# Altium PCB Panel-DQLA-Q.PcbDoc
Units mil, origin at the board's own origin, x right, y up, seen from the top; angles counter-clockwise.
Board outline 14000 x 7000 mil, 6 copper layers (Top Layer, Plane 1, Signal 1, Signal 2, Plane 2, Bottom Layer), stack 32.112 mil thick; 16 components, 0 nets, 144 pads, 0 vias.
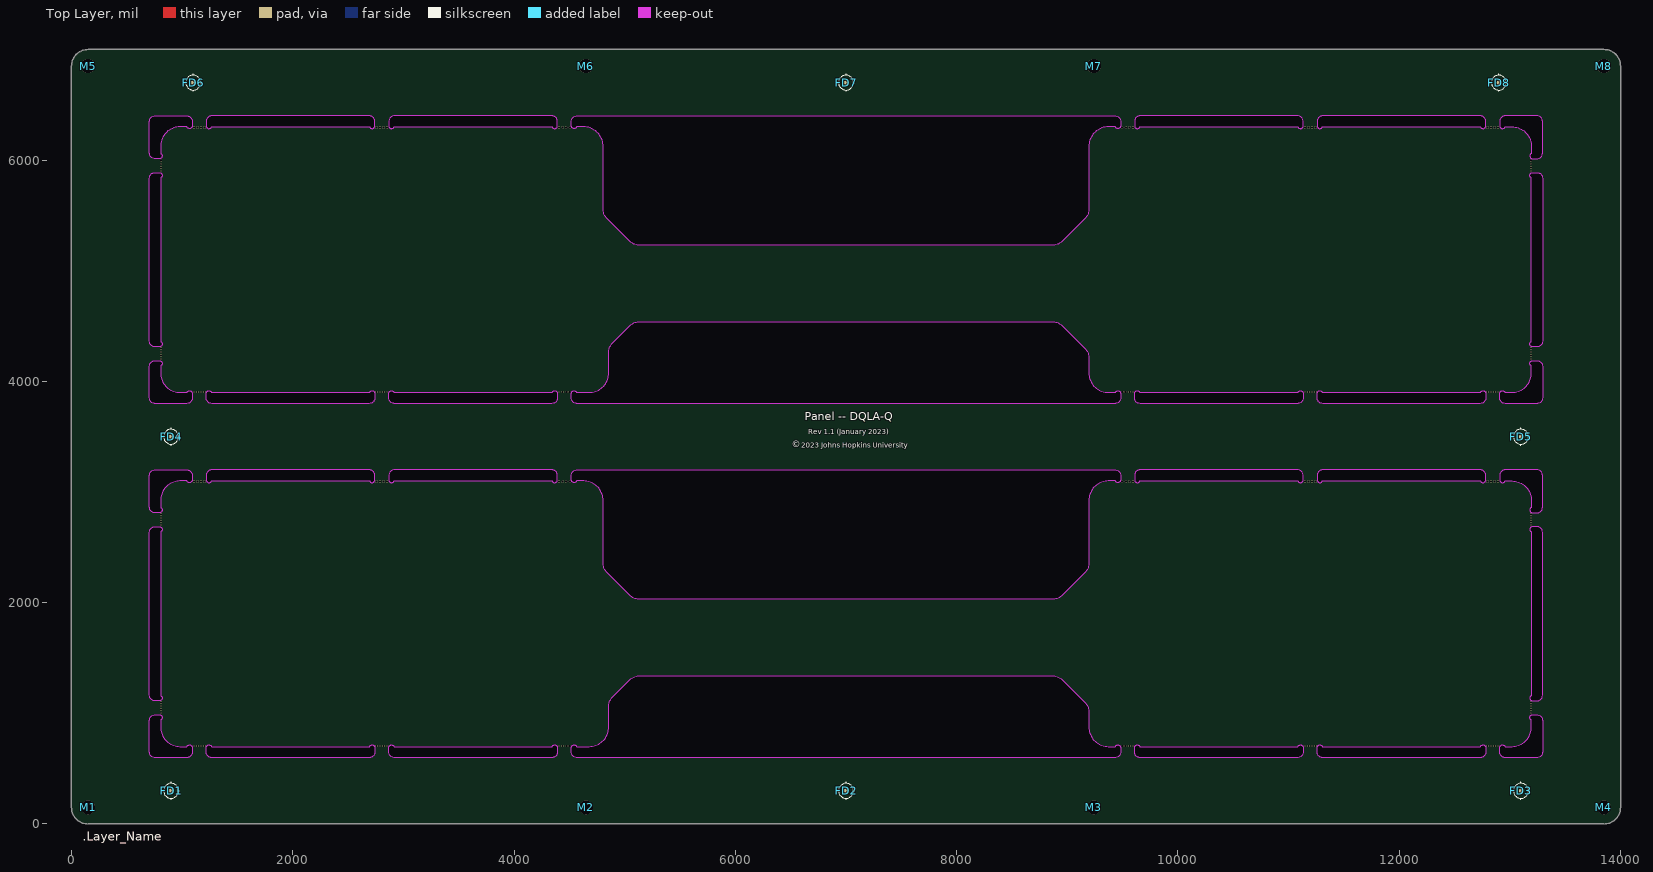
[diagram p0: Top Layer view]
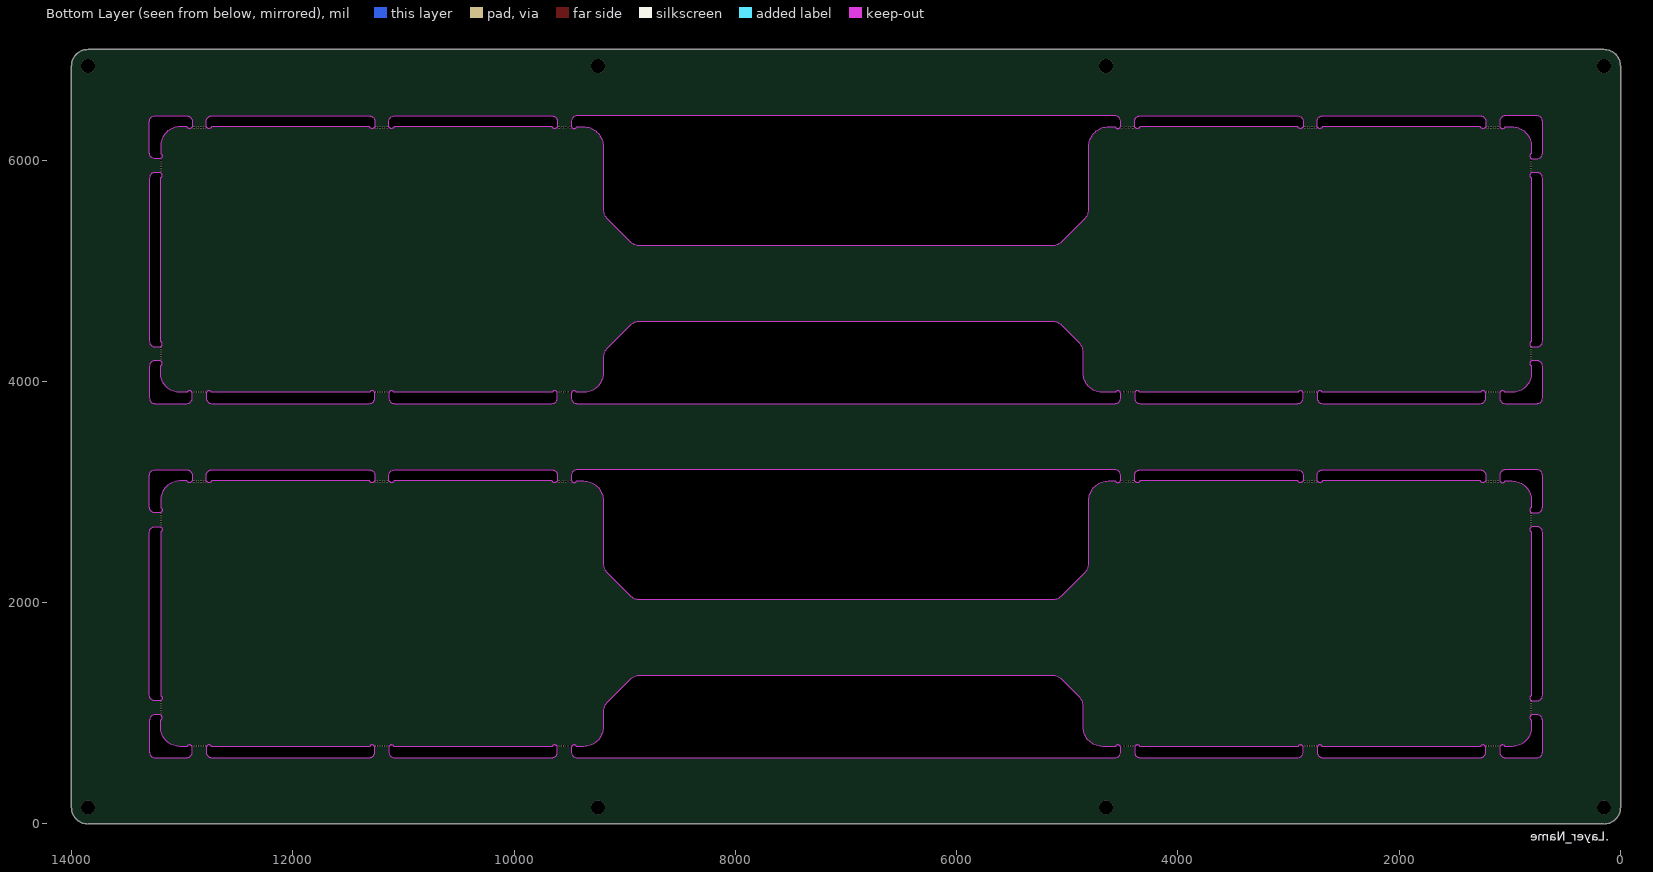
[diagram p1: Bottom Layer view, seen from below]
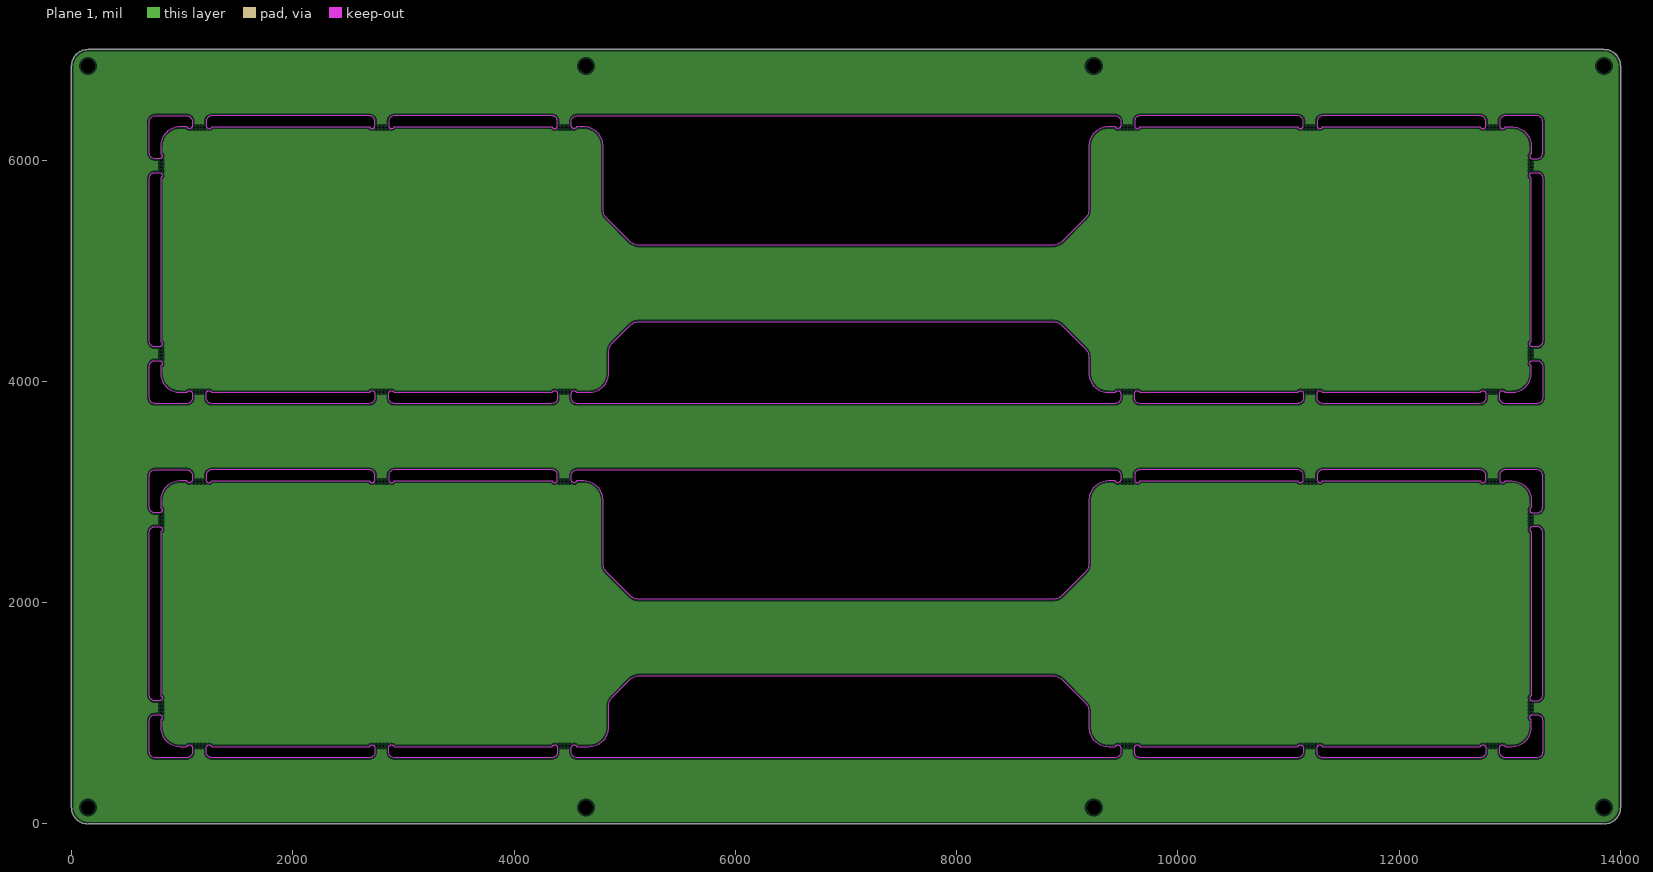
[diagram p2: Plane 1, clearances drawn from the general rule]
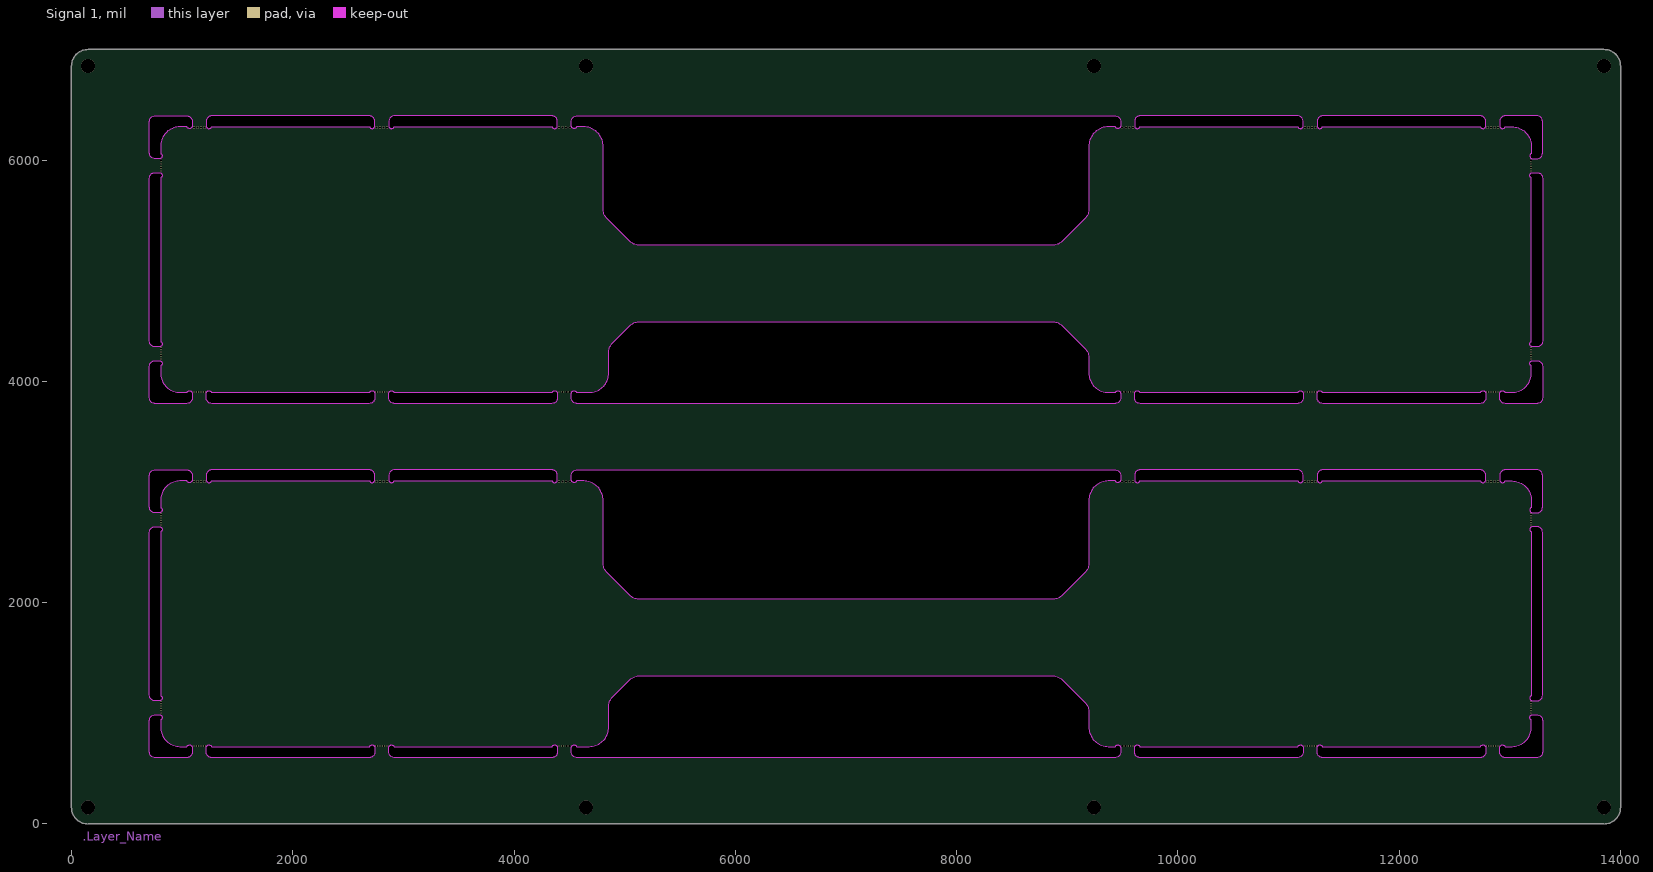
[diagram p3: Signal 1]
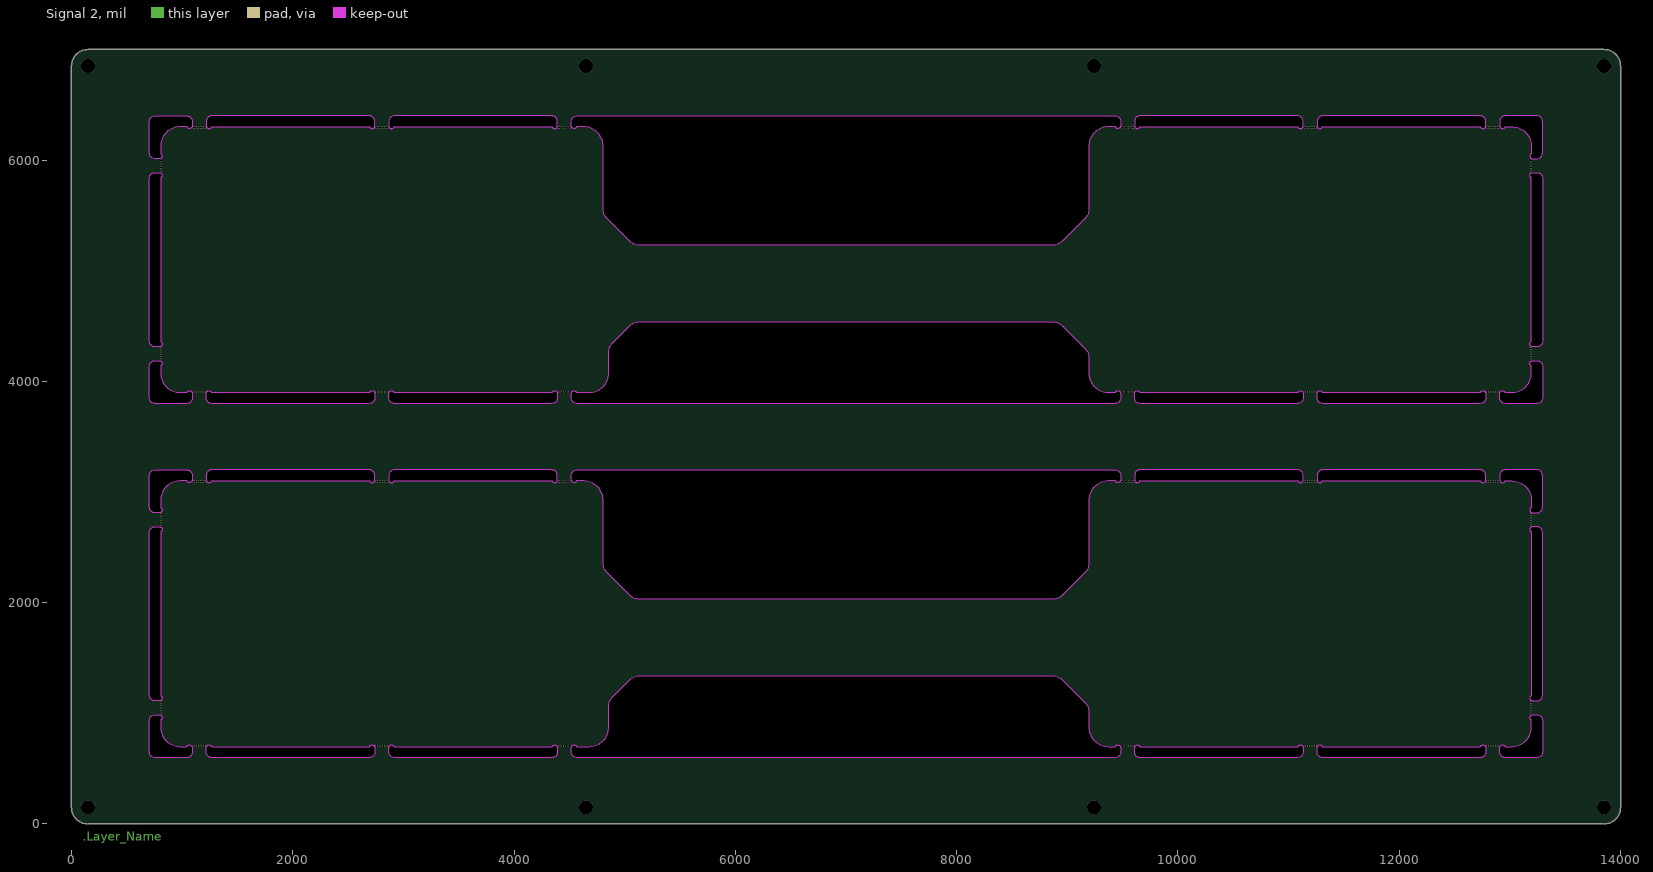
[diagram p4: Signal 2]
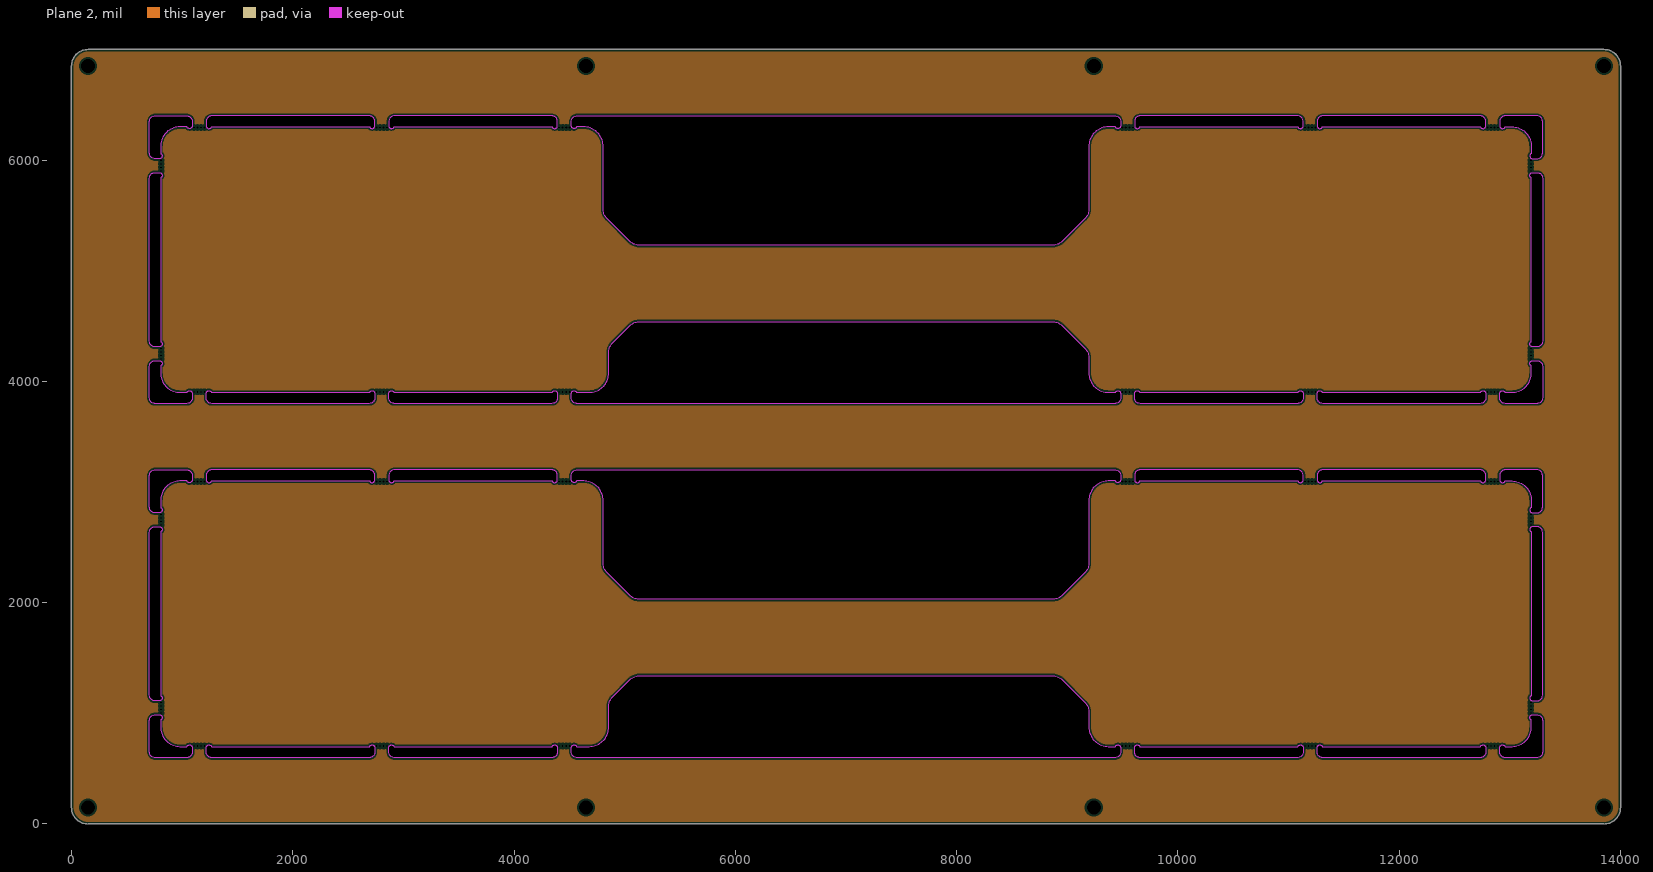
[diagram p5: Plane 2, clearances drawn from the general rule]

## Layer stack, top to bottom
Top Solder: solder mask 0.4, Solder Resist, Dk 3.5
Top Layer: signal copper 1.4
Dielectric 2: prepreg 2.8, PP-006, Dk 4.1
Plane 1: plane copper 1.378
Dielectric 4: core 2.8, PP-006, Dk 4.1
Signal 1: signal copper 1.378
Dielectric 1: dielectric 12.6, FR-4, Dk 4.8
Signal 2: signal copper 1.378
Dielectric 5: core 2.8, PP-006, Dk 4.1
Plane 2: plane copper 1.378
Dielectric 3: prepreg 2.8, PP-006, Dk 4.1
Bottom Layer: signal copper 1.4
Bottom Solder: solder mask 0.4, Solder Resist, Dk 3.5

## Board outline
0,150 0,6850 cw(c150,6850) 150,7000 13850,7000 cw(c13850,6850) 14000,6850 14000,150 cw(c13850,150) 13850,0 150,0 cw(c150,150)
cut-out: 4805,2360 4805,2925 ccw(c4630,2925) 4630,3100 4565.91,3100 cw(c4543,3110) 4518,3110 4518,3150 cw(c4568,3150) 4568,3200 9432,3200 cw(c9432,3150) 9482,3150 9482,3110 cw(c9457,3110) 9434.09,3100 9370,3100 ccw(c9370,2925) 9195,2925 9195,2360 cw(c9070,2360) 9158.39,2271.61 8953.39,2066.61 cw(c8865,2155) 8865,2030 5135,2030 cw(c5135,2155) 5046.61,2066.61 4841.61,2271.61 cw(c4930,2360)
cut-out: 4805,5560 4805,6125 ccw(c4630,6125) 4630,6300 4565.91,6300 cw(c4543,6310) 4518,6310 4518,6350 cw(c4568,6350) 4568,6400 9432,6400 cw(c9432,6350) 9482,6350 9482,6310 cw(c9457,6310) 9434.09,6300 9370,6300 ccw(c9370,6125) 9195,6125 9195,5560 cw(c9070,5560) 9158.39,5471.61 8953.39,5266.61 cw(c8865,5355) 8865,5230 5135,5230 cw(c5135,5355) 5046.61,5266.61 4841.61,5471.61 cw(c4930,5560)
cut-out: 9608,6310 ccw(c9633,6310) 9655.91,6300 9655.9,6300.01 11084.08,6300 ccw(c11106.99,6310) 11132,6310 11132,6350 ccw(c11082,6350) 11082,6400 9658,6400 ccw(c9658,6350) 9608,6350
cut-out: 11258,6310 ccw(c11283,6310) 11305.91,6300 12734.08,6299.99 ccw(c12757,6310) 12782,6310 12782,6350 ccw(c12732,6350) 12732,6400 11308,6400 ccw(c11308,6350) 11258,6350
cut-out: 9608,3110 ccw(c9633,3110) 9655.91,3100 9655.9,3100.01 11084.08,3100 ccw(c11107,3110) 11132,3110 11132,3150 ccw(c11082,3150) 11082,3200 9658,3200 ccw(c9658,3150) 9608,3150
cut-out: 11258,3110 ccw(c11283,3110) 11305.91,3100 12734.08,3099.99 ccw(c12757,3110) 12782,3110 12782,3150 ccw(c12732,3150) 12732,3200 11308,3200 ccw(c11308,3150) 11258,3150
cut-out: 2868,3110 ccw(c2893,3110) 2915.91,3100 4344.08,3099.99 ccw(c4367,3110) 4392,3110 4392,3150 ccw(c4342,3150) 4342,3200 2918,3200 ccw(c2918,3150) 2868,3150
cut-out: 1218,3110 ccw(c1243,3110) 1265.91,3100 1265.9,3100.01 2694.08,3100 ccw(c2717,3110) 2742,3110 2742,3150 ccw(c2692,3150) 2692,3200 1268,3200 ccw(c1268,3150) 1218,3150
cut-out: 2868,6310 ccw(c2893,6310) 2915.91,6300 4344.08,6299.99 ccw(c4367,6310) 4392,6310 4392,6350 ccw(c4342,6350) 4342,6400 2918,6400 ccw(c2918,6350) 2868,6350
cut-out: 1218,6310 ccw(c1243,6310) 1265.91,6300 1265.9,6300.01 2694.08,6300 ccw(c2716.99,6310) 2742,6310 2742,6350 ccw(c2692,6350) 2692,6400 1268,6400 ccw(c1268,6350) 1218,6350
cut-out: 755,6013 cw(c755,6063) 705,6063 705,6350 cw(c755,6350) 755,6400 1042,6400 cw(c1042,6350) 1092,6350 1092,6310 cw(c1067,6310) 1044.09,6300 980,6300 ccw(c980,6125) 805,6125 805,6060.91 cw(c795,6038) 795,6013
cut-out: 755,4313 cw(c755,4363) 705,4363 705,5837 cw(c755,5837) 755,5887 795,5887 cw(c795,5862) 805,5839.09 805,4360.91 cw(c795,4338) 795,4313
cut-out: 755,2813 cw(c755,2863) 705,2863 705,3150 cw(c755,3150) 755,3200 1042,3200 cw(c1042,3150) 1092,3150 1092,3110 cw(c1067,3110) 1044.09,3100 980,3100 ccw(c980,2925) 805,2925 805,2860.91 cw(c795,2838) 795,2813
cut-out: 755,1113 cw(c755,1163) 705,1163 705,2637 cw(c755,2637) 755,2687 795,2687 cw(c795,2662) 805,2639.09 805,1160.91 cw(c795,1138) 795,1113
cut-out: 12908,6310 ccw(c12933,6310) 12955.91,6300 13019.99,6300 cw(c13020,6125) 13195,6125 13195,6060.91 ccw(c13205,6038) 13205,6013 13245,6013 ccw(c13245,6063) 13295,6063 13295,6350 ccw(c13245,6350) 13245,6400 12958,6400 ccw(c12958,6350) 12908,6350
cut-out: 13195,4360.91 13195,5839.09 cw(c13205,5862) 13205,5887 13245,5887 cw(c13245,5837) 13295,5837 13295,4363 cw(c13245,4363) 13245,4313 13205,4313 cw(c13205,4338)
cut-out: 12908,3110 ccw(c12933,3110) 12955.91,3100 13019.99,3100 cw(c13020,2925) 13195,2925 13195,2860.91 ccw(c13205,2838) 13205,2813 13245,2813 ccw(c13245,2863) 13295,2863 13295,3150 ccw(c13245,3150) 13245,3200 12958,3200 ccw(c12958,3150) 12908,3150
cut-out: 13195,1160.91 ccw(c13205,1138) 13205,1113 13245,1113 ccw(c13245,1163) 13295,1163 13295,2637 ccw(c13245,2637) 13245,2687 13205,2687 ccw(c13205,2662) 13195,2639.09
cut-out: 12908,650 12908,690 cw(c12933,690) 12955.91,700 13020,700 ccw(c13020,875) 13195,875 13195,939.09 cw(c13205,962) 13205,987 13245,987 cw(c13245,937) 13295,937 13295,650 cw(c13245,650) 13245,600 12958,600 cw(c12958,650)
cut-out: 12908,3850 12908,3890 cw(c12933,3890) 12955.91,3900 13020,3900 ccw(c13020,4075) 13195,4075 13195,4139.09 cw(c13205,4162) 13205,4187 13245,4187 cw(c13245,4137) 13295,4137 13295,3850 cw(c13245,3850) 13245,3800 12958,3800 cw(c12958,3850)
cut-out: 11258,3850 11258,3890 cw(c11283,3890) 11305.91,3900 12734.08,3900.01 cw(c12757,3890) 12782,3890 12782,3850 cw(c12732,3850) 12732,3800 11308,3800 cw(c11308,3850)
cut-out: 9608,3850 9608,3890 cw(c9633,3890) 9655.91,3900 9655.9,3899.99 11084.08,3900 cw(c11106.99,3890) 11132,3890 11132,3850 cw(c11082,3850) 11082,3800 9658,3800 cw(c9658,3850)
cut-out: 11258,650 11258,690 cw(c11283,690) 11305.91,700 12734.08,700.01 cw(c12757,690) 12782,690 12782,650 cw(c12732,650) 12732,600 11308,600 cw(c11308,650)
cut-out: 9608,650 9608,690 cw(c9633,690) 9655.91,700 9655.9,699.99 11084.08,700 cw(c11107,690) 11132,690 11132,650 cw(c11082,650) 11082,600 9658,600 cw(c9658,650)
cut-out: 4518,3850 4518,3890 cw(c4543,3890) 4565.91,3900 4680,3900 ccw(c4680,4075) 4855,4075 4855,4260 cw(c4980,4260) 4891.61,4348.39 5046.61,4503.39 cw(c5135,4415) 5135,4540 8865,4540 cw(c8865,4415) 8953.39,4503.39 9158.39,4298.39 cw(c9070,4210) 9195,4210 9195,4075 ccw(c9370,4075) 9370,3900 9434.09,3900 cw(c9457,3890) 9482,3890 9482,3850 cw(c9432,3850) 9432,3800 4568,3800 cw(c4568,3850)
cut-out: 4518,650 4518,690 cw(c4543,690) 4565.91,700 4680,700 ccw(c4680,875) 4855,875 4855,1060 cw(c4980,1060) 4891.61,1148.39 5046.61,1303.39 cw(c5135,1215) 5135,1340 8865,1340 cw(c8865,1215) 8953.39,1303.39 9158.39,1098.39 cw(c9070,1010) 9195,1010 9195,875 ccw(c9370,875) 9370,700 9434.09,700 cw(c9457,690) 9482,690 9482,650 cw(c9432,650) 9432,600 4568,600 cw(c4568,650)
cut-out: 2868,3850 2868,3890 cw(c2893,3890) 2915.91,3900 4344.08,3900.01 cw(c4367,3890) 4392,3890 4392,3850 cw(c4342,3850) 4342,3800 2918,3800 cw(c2918,3850)
cut-out: 2868,650 2868,690 cw(c2893,690) 2915.91,700 4344.08,700.01 cw(c4367,690) 4392,690 4392,650 cw(c4342,650) 4342,600 2918,600 cw(c2918,650)
cut-out: 1218,3850 1218,3890 cw(c1243,3890) 1265.91,3900 1265.9,3899.99 2694.08,3900 cw(c2716.99,3890) 2742,3890 2742,3850 cw(c2692,3850) 2692,3800 1268,3800 cw(c1268,3850)
cut-out: 705,3850 705,4137 cw(c755,4137) 755,4187 795,4187 cw(c795,4162) 805,4139.09 805,4075 ccw(c980,4075) 980,3900 1044.09,3900 cw(c1067,3890) 1092,3890 1092,3850 cw(c1042,3850) 1042,3800 755,3800 cw(c755,3850)
cut-out: 1218,650 1218,690 cw(c1243,690) 1265.91,700 1265.9,699.99 2694.08,700 cw(c2717,690) 2742,690 2742,650 cw(c2692,650) 2692,600 1268,600 cw(c1268,650)
cut-out: 705,650 705,937 cw(c755,937) 755,987 795,987 cw(c795,962) 805,939.09 805,875 ccw(c980,875) 980,700 1044.09,700 cw(c1067,690) 1092,690 1092,650 cw(c1042,650) 1042,600 755,600 cw(c755,650)

## Design rules (kind name [scope] priority, off if disabled: settings)
Clearance ClearancePoly [InPoly] p1: gap=10 ignorepadtopadclearanceinfootprint=FALSE
Clearance [All] p2: gap=6 ignorepadtopadclearanceinfootprint=FALSE
ComponentClearance [All] p1 off: gap=10 collisioncheckmode=3 verticalgap=10 showdistances=FALSE
PlaneClearance [All] p1: clearance=20
PlaneConnect [All] p1: planeconnectstyle=Relief reliefexpansion=20 reliefentries=4 reliefconductorwidth=10 reliefairgap=10
PolygonConnect [All] p1: connectstyle=Direct reliefconductorwidth=10 reliefentries=4 polygonreliefangle="90 Angle" airgapwidth=10
RoutingVias [All] p1: holewidth=8 width=18 viastyle="Through Hole" minholewidth=8 minwidth=18 maxholewidth=8 maxwidth=18
SolderMaskExpansion [All] p1: expansion=4 istentingtop=FALSE
Width [All] p1: maxlimit=100 minlimit=6 preferedwidth=8
27 further rules are at their usual default settings.

## Components (designator, comment, footprint, x,y, rotation, side; value= is the part's Value field where it differs from the comment)
FD1 "FD" FD 900,300 r0 top
FD2 "FD" FD 7000,300 r0 top
FD3 "FD" FD 13100,300 r0 top
FD4 "FD" FD 900,3500 r0 top
FD5 "FD" FD 13100,3500 r0 top
FD6 "FD" FD 1100,6700 r0 top
FD7 "FD" FD 7000,6700 r0 top
FD8 "FD" FD 12900,6700 r0 top
M1 "MHOLE" MHOLE4 150,150 r0 top
M2 "MHOLE" MHOLE4 4650,150 r0 top
M3 "MHOLE" MHOLE4 9240,150 r0 top
M4 "MHOLE" MHOLE4 13850,150 r0 top
M5 "MHOLE" MHOLE4 150,6850 r0 top
M6 "MHOLE" MHOLE4 4650,6850 r0 top
M7 "MHOLE" MHOLE4 9240,6850 r0 top
M8 "MHOLE" MHOLE4 13850,6850 r0 top

## Footprints (in the part's own frame and the unit in brackets; to place one, negate y for a bottom-side part, rotate by r counter-clockwise, add the part's x,y. Pads: shape width x height; smd on the part's side, far side on the other; paste and mask are expansions set on the pad)
FD [mil]
  round 40 smd paste+0: 0(0,0)
  silkscreen extent -80,-80 80,80
MHOLE4 [mil]
  round 125 hole 125 unplated: 1(0,0)

## Part data
M1 M2 M3 M4 M5 M6 M7 M8: "Mounting Hole"

## Free pads (board coordinates)
  round 20 hole 20 unplated: 0(810,4266) 0(810,5934) 0(810,1066) 0(810,2734) 0(1171,3905) 0(1171,6295) 0(1171,705) 0(1171,3095) 0(2821,3905) 0(2821,6295) 0(2821,705) 0(2821,3095) 0(4439,3905) 0(4439,6295) 0(4439,705) 0(4439,3095) 0(9561,3905) 0(9561,6295) 0(9561,705) 0(9561,3095) 0(11211,3905) 0(11211,6295) 0(11211,705) 0(11211,3095) 0(12829,3905) 0(12829,6295) 0(12829,705) 0(12829,3095) 0(13190,4266) 0(13190,5934) 0(13190,1066) 0(13190,2734) 1(810,4234) 1(810,4298) 1(810,5902) 1(810,5966) 1(810,4202) 1(810,5998) 1(810,1034) 1(810,1098) 1(810,2702) 1(810,2766) 1(810,1002) 1(810,2798) 1(1107,3905) 1(1107,6295) 1(1107,705) 1(1107,3095) 1(1139,3905) 1(1139,6295) 1(1139,705) 1(1139,3095) 1(1203,3905) 1(1203,6295) 1(1203,705) 1(1203,3095) 1(2757,3905) 1(2757,6295) 1(2757,705) 1(2757,3095) 1(2789,3905) 1(2789,6295) 1(2789,705) 1(2789,3095) 1(2853,3905) 1(2853,6295) 1(2853,705) 1(2853,3095) 1(4407,3905) 1(4407,6295) 1(4407,705) 1(4407,3095) 1(4471,3905) 1(4471,6295) 1(4471,705) 1(4471,3095) 1(4503,3905) 1(4503,6295) 1(4503,705) 1(4503,3095) 1(9497,3905) 1(9497,6295) 1(9497,705) 1(9497,3095) 1(9529,3905) 1(9529,6295) 1(9529,705) 1(9529,3095) 1(9593,3905) 1(9593,6295) 1(9593,705) 1(9593,3095) 1(11147,3905) 1(11147,6295) 1(11147,705) 1(11147,3095) 1(11179,3905) 1(11179,6295) 1(11179,705) 1(11179,3095) 1(11243,3905) 1(11243,6295) 1(11243,705) 1(11243,3095) 1(12797,3905) 1(12797,6295) 1(12797,705) 1(12797,3095) 1(12861,3905) 1(12861,6295) 1(12861,705) 1(12861,3095) 1(12893,3905) 1(12893,6295) 1(12893,705) 1(12893,3095) 1(13190,4202) 1(13190,5998) 1(13190,4234) 1(13190,4298) 1(13190,5902) 1(13190,5966) 1(13190,1002) 1(13190,2798) 1(13190,1034) 1(13190,1098) 1(13190,2702) 1(13190,2766)

## Nets (pads, with @x,y where several pads share a name; then routed paths per layer and width w, separated by ;. In a path a pad name is that pad's centre, name@x,y a point inside that pad or via, vN(x,y) a via of type N, cw(c..) or ccw(c..) an arc to the next point about the centre after c; other vN are vias at no path point)
pads on no net: FD1.0 FD2.0 FD3.0 FD4.0 FD5.0 FD6.0 FD7.0 FD8.0 M1.1 M2.1 M3.1 M4.1 M5.1 M6.1 M7.1 M8.1

## Polygon pours and split planes (outlines as drawn)
no net on Plane 1 (split plane): 13875.4,6977.68 13891.85,6973.27 13907.58,6966.76 13922.33,6958.24 13935.83,6947.88 13947.88,6935.83 13958.24,6922.33 13966.76,6907.58 13973.27,6891.85 13977.68,6875.4 13979.9,6858.51 13979.9,6850 13979.9,150 13979.9,141.49 13977.68,124.6 13973.27,108.15 13966.76,92.42 13958.24,77.67 13947.88,64.17 13935.83,52.12 13922.32,41.76 13907.58,33.24 13891.85,26.73 13875.4,22.32 13858.51,20.1 141.49,20.1 124.6,22.32 108.15,26.73 92.42,33.24 77.67,41.76 64.17,52.12 52.12,64.17 41.76,77.67 33.24,92.42 26.73,108.15 22.32,124.6 20.1,141.49 20.1,150 20.1,6850 20.1,6858.51 22.32,6875.4 26.73,6891.85 33.24,6907.58 41.76,6922.33 52.12,6935.83 64.16,6947.88 77.67,6958.24 92.42,6966.76 108.15,6973.27 124.6,6977.68 141.49,6979.9 150,6979.9 13858.51,6979.9
no net on Plane 2 (split plane): 13875.4,6977.68 13891.85,6973.27 13907.58,6966.76 13922.33,6958.24 13935.83,6947.88 13947.88,6935.83 13958.24,6922.33 13966.76,6907.58 13973.27,6891.85 13977.68,6875.4 13979.9,6858.51 13979.9,6850 13979.9,150 13979.9,141.49 13977.68,124.6 13973.27,108.15 13966.76,92.42 13958.24,77.67 13947.88,64.17 13935.83,52.12 13922.32,41.76 13907.58,33.24 13891.85,26.73 13875.4,22.32 13858.51,20.1 141.49,20.1 124.6,22.32 108.15,26.73 92.42,33.24 77.67,41.76 64.17,52.12 52.12,64.17 41.76,77.67 33.24,92.42 26.73,108.15 22.32,124.6 20.1,141.49 20.1,150 20.1,6850 20.1,6858.51 22.32,6875.4 26.73,6891.85 33.24,6907.58 41.76,6922.33 52.12,6935.83 64.16,6947.88 77.67,6958.24 92.42,6966.76 108.15,6973.27 124.6,6977.68 141.49,6979.9 150,6979.9 13858.51,6979.9

## Other copper
Top Layer:
  text ".Layer_Name" at 100,-150 h80
Signal 1:
  text ".Layer_Name" at 100,-150 h80
Signal 2:
  text ".Layer_Name" at 100,-150 h80
Bottom Layer:
  text ".Layer_Name" at 100,-150 h80
Plane 1 (plane layer: these items are gaps in the copper):
  text ".Layer_Name" at 100,-150 h80
Plane 2 (plane layer: these items are gaps in the copper):
  text ".Layer_Name" at 100,-150 h80

## Silkscreen, mask and mechanical layers (free items; w line width, h text height)
Top Overlay:
  text "Panel -- DQLA-Q" at 6628.23,3620.61 h125
  text "Rev 1.1 (January 2023)" at 6661.02,3506.52 h80
  text "©" at 6510.33,3383.74 h100
  text "2023 Johns Hopkins University" at 6595.76,3381.52 h80
  text ".Layer_Name" at 100,-150 h80
Bottom Overlay:
  text ".Layer_Name" at 100,-150 h80
Top Solder:
  text ".Layer_Name" at 100,-150 h80
Bottom Solder:
  text ".Layer_Name" at 100,-150 h80
Mechanical 5:
  drawing of 345 lines, arcs and shapes, not listed
Drill Drawing:
  circle w25: c6985,7930 r12
  circle w25: c6985,8405 r12
  circle w25: c6985,8180 r12
  circle w25: c6985,8055 r12
  circle w25: c10735,8680 r12
  circle w25: c10735,8805 r12
  lines w10: 6130,6825 6175,6750 ; 6220,6825 6175,6750 ; 6925,7925 6525,7925 6175,7575 6175,6750 ; 9950,-850 9950,-275 14225,-275 ; 9950,-700 14225,-700 ; 9950,-570 12450,-570 ; 12450,-700 12450,-275 ; 13600,-850 13600,-700
  lines w15: 148.05,8609.63 2220.35,8609.63 ; 710.46,7575.33 710.46,8816.49 ; 1137.94,7575.33 1137.94,8816.49 ; 1726.87,7575.33 1726.87,8816.49 ; -400,-850 -400,9225 14225,9225 14225,-850 -400,-850 ; 148.05,7575.33 2220.35,7575.33 2220.35,8816.49 148.05,8816.49 148.05,7575.33
  text "Drill Legend:" at 0,8925 h200
  text "Notes:" at 6725,8925 h200
  text "_" at 12841,8915 h110
  text "6." at 10550,8900 h110
  text "Unless specified otherwise, all tolerances are +0.005, except:" at 10700,8900 h110
  text "_" at 11700,8790 h110
  text "1." at 6800,8775 h110
  text "Except as authorized below," at 6950,8775 h110
  text "DO NOT MODIFY ANY" at 8300,8775 h150
  text "Hole diameters are +0.003 for holes 0.020 and larger." at 10800,8775 h110
  text "Symbol" at 272.17,8671.69 h120
  text "Count" at 772.52,8671.69 h120
  text "Hole Size" at 1200,8671.69 h120
  text "Plated" at 1788.93,8671.69 h120
  text "GERBER DATA WITHOUT CUSTOMER APPROVAL." at 7050,8650 h150
  text "Hole diameters are +0.003 -dia. for holes smaller than 0.020" at 10800,8650 h110
  text "2." at 6800,8500 h110
  text "The following changes to the Gerber data are authorized:" at 6950,8500 h110
  text "7." at 10550,8500 h110
  text "All holes of diameter 0.020 and larger MUST remain open." at 10700,8500 h110
  text "646" at 772.52,8464.83 h100
  text "8.0mil" at 1200,8464.83 h100
  text "PTH" at 1788.93,8464.83 h100
  text "A" at 234.66,8454.84 h91.94
  text "Top & Bottom silk screen can be clipped or modified to" at 7050,8375 h110
  text "Smaller holes can be open or plugged." at 10775,8375 h110
  text "resolve \"silk screen over pads\" issues." at 7175,8275 h110
  text "128" at 772.52,8257.97 h100
  text "20.0mil" at 1200,8257.97 h100
  text "NPTH" at 1788.93,8257.97 h100
  text "B" at 234.66,8247.98 h91.94
  text "8." at 10550,8225 h110
  text "Material: FR4 (170TG)" at 10700,8225 h110
  text "Copper width can be adjusted for over-etch or impedance control." at 7050,8150 h110
  text "9." at 10550,8075 h110
  text "Finish: ENIG" at 10700,8075 h110
  text "352" at 772.52,8051.11 h100
  text "32.0mil" at 1200,8051.11 h100
  text "PTH" at 1788.93,8051.11 h100
  text "C" at 234.66,8041.12 h91.94
  text "Required vendor markings and date codes can be added." at 7050,8025 h110
  text "10." at 10500,7925 h110
  text "RoHS Compliant: Yes" at 10700,7925 h110
  text "Thieving patterns can be added to the" at 7050,7900 h110
  text "RAIL AREAS ONLY" at 8850,7900 h150
  text "16" at 772.52,7844.25 h100
  text "120.0mil" at 1200,7844.25 h100
  text "PTH" at 1788.93,7844.25 h100
  text "D" at 234.66,7834.26 h91.94
  text "11." at 10500,7775 h110
  text "Solder Mask: Green LPI" at 10700,7775 h110
  text "3." at 6800,7750 h110
  text "The array consists of 2 identical boards." at 6950,7750 h110
  text "8" at 772.52,7637.39 h100
  text "125.0mil" at 1200,7637.39 h100
  text "NPTH" at 1788.93,7637.39 h100
  text "E" at 234.66,7627.4 h91.94
  text "12." at 10500,7625 h110
  text "Silk Screen: White" at 10700,7625 h110
  text "4." at 6800,7600 h110
  text "The board must be individually marked with Vendor ID, Date Code," at 6950,7600 h110
  text "UL 94V-0 Cert and any other relevant vendor data." at 7050,7475 h110
  text "13." at 10500,7475 h110
  text "Board must be fabricated to IPC-6012B Class 2." at 10700,7475 h110
  text "5." at 6800,7325 h110
  text "Unless specified otherwise, all dimensions are in inches." at 6950,7325 h110
  text "14." at 10500,7325 h110
  text "Vendor and process must be UL 94V-0 approved." at 10700,7325 h110
  text "15." at 10500,7175 h110
  text "See separate Stackup Drawing for layer stackup and board thickness." at 10700,7175 h110
  text "Slot" at 1050,6375 h80 r180
  text "Cut Out" at 13225,6375 h80 r180
  text "Cut Out" at 725,6325 h80 r270
  text "Slot -- Must Be Cut Out" at 1650,6325 h80
  text "Slot -- Must Be Cut Out" at 3250,6325 h80
  text "Slot -- Must Be Cut Out" at 10075,6325 h80
  text "Slot -- Must Be Cut Out" at 11650,6325 h80
  text "Slot" at 13275,6050 h80 r90
  text "Slot -- Must Be Cut Out" at 6250,5700 h200
  text "Slot -- Must Be Cut Out" at 725,5450 h80 r270
  text "Slot -- Must Be Cut Out" at 13225,5450 h80 r270
  text "Slot" at 725,4150 h80 r270
  text "Slot -- Must Be Cut Out" at 6250,4125 h200
  text "Cut Out" at 13275,3875 h80 r90
  text "Cut Out" at 775,3825 h80
  text "Slot -- Must Be Cut Out" at 1650,3825 h80
  text "Slot -- Must Be Cut Out" at 3250,3825 h80
  text "Slot -- Must Be Cut Out" at 10050,3825 h80
  text "Slot -- Must Be Cut Out" at 11650,3825 h80
  text "Slot" at 12950,3825 h80
  text "Slot" at 1050,3175 h80 r180
  text "Cut Out" at 13225,3175 h80 r180
  text "Cut Out" at 725,3125 h80 r270
  text "Slot -- Must Be Cut Out" at 1650,3125 h80
  text "Slot -- Must Be Cut Out" at 3250,3125 h80
  text "Slot -- Must Be Cut Out" at 10075,3125 h80
  text "Slot -- Must Be Cut Out" at 11650,3125 h80
  text "Slot" at 13275,2850 h80 r90
  text "Slot -- Must Be Cut Out" at 6250,2550 h200
  text "Slot -- Must Be Cut Out" at 725,2250 h80 r270
  text "Slot -- Must Be Cut Out" at 13225,2250 h80 r270
  text "Slot" at 725,950 h80 r270
  text "Slot -- Must Be Cut Out" at 6250,925 h200
  text "Cut Out" at 13275,675 h80 r90
  text "Cut Out" at 775,625 h80
  text "Slot -- Must Be Cut Out" at 1650,625 h80
  text "Slot -- Must Be Cut Out" at 3250,625 h80
  text "Slot -- Must Be Cut Out" at 10050,625 h80
  text "Slot -- Must Be Cut Out" at 11650,625 h80
  text "Slot" at 12950,625 h80
  text "Title:" at 10000,-375 h100
  text "Johns Hopkins University" at 12500,-425 h150
  text "DQLA-Q (Dual QLA Interface Board)" at 10100,-500 h150
  text "Laboratory for Computational" at 12575,-550 h100
  text "Sensing and Robotics" at 12575,-650 h100
  text "Date:" at 10000,-665 h100
  text ".Print_Date" at 10275,-665 h100
  text "Rev:" at 11925,-665 h100
  text "1.1" at 12200,-665 h100
  text "File:" at 10000,-800 h100
  text ".Pcb_File_Name_No_Path" at 10275,-800 h100
  text "Sheet 1 of 1" at 13650,-800 h100

## Dimensions
0,-50 to 14000,-50 on Drill Drawing
-50,0 to -75,7000 on Drill Drawing

## Panel: embedded boards
"..\DQLA-Q.PcbDoc" at 2805,1900, 2 rows x 1 columns, spacing 3200 x 1500, rotation 0